# Allegro board C112P01-T2-JDQ-A03.brd
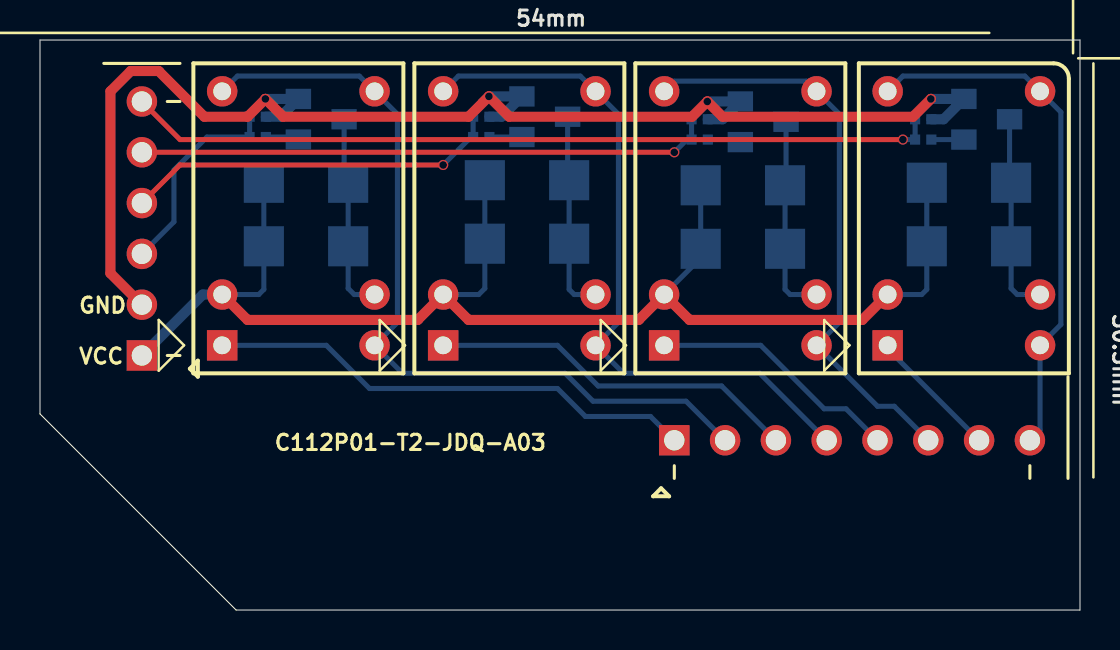
[diagram p0: board, top side]
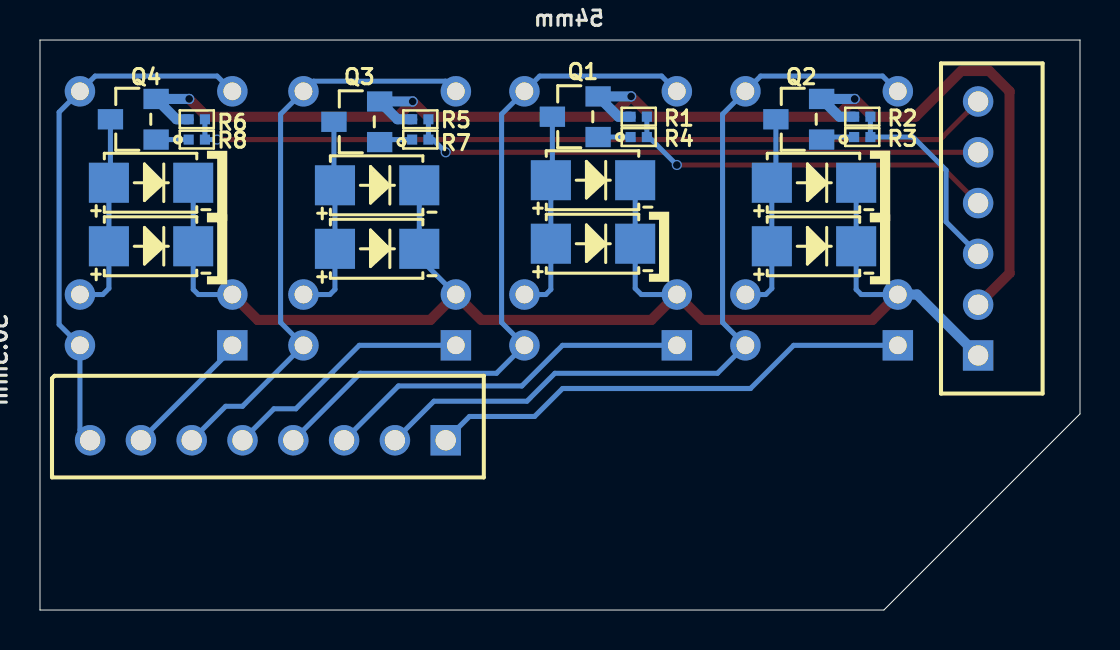
[diagram p1: board, bottom side, seen from below]

Outline 52 x 28.5 mm; copper layers: TOP, BOTTOM. Coordinates in mm from the lower left corner of the outline.
Outline path: 0,28.5 0,9.8 9.81,0 52,0 52,28.5 0,28.5

## Design rules (mm)
constraint set DEFAULT: min track width 0.152
net group GND: nets GND JTAG_TCK/SPI1_SDO JTAG_TDO/SPI1_SDI JTAG_TMS/SPI1_CSN0 JTAG_TRSTN/SPI1_SCLK N17073941 N17073954 N17073967 N17073980

## Placement (name value [footprint] x y rotation side)
D1  S1G  [SMA]  24.35 21.49 180 bottom
D2  S1G  [SMA]  24.35 18.31 180 bottom
D3  S1G  [SMA]  13.3 21.36 180 bottom
D4  S1G  [SMA]  13.3 18.19 180 bottom
D5  S1G  [SMA]  35.14 18.06 180 bottom
D6  S1G  [SMA]  35.14 21.23 180 bottom
D7  S1G  [SMA]  46.45 21.36 180 bottom
D8  S1G  [SMA]  46.45 18.19 180 bottom
J1  CON6  [CON1X6PD254]  5.09 16.54 90 top
J2  CON8  [CON1X8PD254]  35.52 8.49 0 top
K1  HK4100F-DC5V-SHG  [HK4100F-1]  23.97 19.58 90 top
K2  HK4100F-DC5V-SHG  [HK4100F-1]  12.92 19.58 90 top
K3  HK4100F-DC5V-SHG  [HK4100F-1]  35.02 19.58 90 top
K4  HK4100F-DC5V-SHG  [HK4100F-1]  46.19 19.58 90 top
NOREF  -  []  0.47 30.38 0 top
Q1  ss8050  [SOT23-Z]  25.24 24.66 90 bottom
Q2  ss8050  [SOT23-Z]  14.06 24.54 90 bottom
Q3  ss8050  [SOT23-Z]  36.16 24.41 90 bottom
Q4  ss8050  [SOT23-Z]  47.34 24.54 90 bottom
R1  10K  [SR0402]  22.06 24.66 0 bottom
R2  10K  [SR0402]  10.89 24.66 0 bottom
R3  1K  [SR0402]  10.89 23.65 0 bottom
R4  1K  [SR0402]  22.06 23.65 0 bottom
R5  10K  [SR0402]  32.98 24.54 0 bottom
R6  10K  [SR0402]  44.16 24.54 0 bottom
R7  1K  [SR0402]  32.98 23.52 0 bottom
R8  1K  [SR0402]  44.16 23.52 0 bottom

## Library data of the parts
D1 = DIODE_16
D2 = DIODE_14
D3 = DIODE_11
D4 = DIODE_12
D5 = DIODE_15
D6 = DIODE_17
D7 = DIODE_18
D8 = DIODE_19
J1 = CON6: Tolerance: #TOL; User Part Number: HAMP
J2 = CON8: Tolerance: #TOL; User Part Number: HAMP
K1-K4 = HK4100F-DC5V-SHG
Q1-Q4 = PNP BEC
R1-R8 = R: signal model: DEFAULT_RESISTOR_33000OHM_1_2

## Footprints (pads in the part's own frame, mm; a bottom-side part is the same pattern mirrored in y, then rotated)
CON1X6PD254
  rect 1.524x1.524 hole 1.016: 1(-3.81,0)
  round 1.524 hole 1.016: 2(-1.27,0) 3(1.27,0) 4(3.81,0) 5(6.35,0) 6(8.89,0)
CON1X8PD254
  rect 1.524x1.524 hole 1.016: 1(-3.81,0)
  round 1.524 hole 1.016: 2(-1.27,0) 3(1.27,0) 4(3.81,0) 5(6.35,0) 6(8.89,0) 7(11.43,0) 8(13.97,0)
HK4100F-1
  rect 1.524x1.524 hole 0.889: 1(-6.35,3.81)
  round 1.524 hole 0.889: 2(-6.35,-3.81) 3(-3.81,3.81) 4(-3.81,-3.81) 5(6.35,3.81) 6(6.35,-3.81)
SMA
  rect 2.007x2.007 smd: 1(-2.108,0) 2(2.108,0)
SOT23-Z
  rect 1.016x1.27 smd: 1(-1.016,-1.143) 2(1.016,-1.143) 3(0,1.143)
SR0402
  rect 0.508x0.508 smd: 1(-0.406,0) 2(0.406,0)

## Nets
GND: J1.2 Q1.2(E) Q2.2(E) Q3.2(E) Q4.2(E) R1.2(B) R2.2(B) R5.2(B) R6.2(B)
VCC_1: D1.2 D2.2 D3.2 D4.2 D5.2 D6.2 D7.2 D8.2 J1.1 K1.3 K2.3 K3.3 K4.3
JTAG_TCK/SPI1_SDO: J1.4 R1.1(A) R4.1(A)
JTAG_TDO/SPI1_SDI: J1.6 R6.1(A) R8.1(A)
JTAG_TMS/SPI1_CSN0: J1.5 R5.1(A) R7.1(A)
JTAG_TRSTN/SPI1_SCLK: J1.3 R2.1(A) R3.1(A)
RELAY+1: J2.1 K2.1
RELAY+2: J2.3 K1.1
RELAY+3: J2.5 K3.1
RELAY+4: J2.7 K4.1
RELAY-1: J2.2 K2.2 K2.5 K2.6
RELAY-2: J2.4 K1.2 K1.5 K1.6
RELAY-3: J2.6 K3.2 K3.5 K3.6
RELAY-4: J2.8 K4.2 K4.5 K4.6
N17073585: D7.1 D8.1 K4.4 Q4.3(C)
N17073629: D3.1 D4.1 K2.4 Q2.3(C)
N17073691: D1.1 D2.1 K1.4 Q1.3(C)
N17073747: D5.1 D6.1 K3.4 Q3.3(C)
N17073941: Q2.1(B) R3.2(B)
N17073954: Q1.1(B) R4.2(B)
N17073967: Q4.1(B) R8.2(B)
N17073980: Q3.1(B) R7.2(B)

## Via types
v1: diameter 0.508, hole 0.381, TOP to BOTTOM, 7 vias

## Routing (per net, layer and track width the routed paths; a pad name or vN(x,y) marks a point on that pad's centre or on a via; arc(x,y) is an arc through that point)
GND: length 71
  TOP w0.508: J1.2 3.52,16.84 3.52,25.93 4.54,26.95 5.93,26.95 8.22,24.66 10.38,24.66 v1(11.27,25.55) 12.16,24.66 21.43,24.66 v1(22.44,25.68) 23.46,24.66 32.6,24.66 v1(33.37,25.43) 34.13,24.66 43.65,24.66 v1(44.54,25.55)
  BOTTOM w0.508: R5.2 34.13,24.54 Q3.2 v1(33.37,25.43) ; R1.2 23.08,24.66 Q1.2 v1(22.44,25.68) ; R6.2 45.18,24.54 Q4.2 v1(44.54,25.55) ; R2.2 12.03,24.66 Q2.2 v1(11.27,25.55)
VCC_1: length 70.5
  TOP w0.508: K4.3 41.11,14.5 32.48,14.5 K3.3 29.94,14.5 21.43,14.5 20.16,15.77 18.89,14.5 10.38,14.5 K2.3
  BOTTOM w0.254: D7.2 D8.2 44.34,16.03 44.08,15.77 K4.3 ; K3.3 33.04,17.6 D5.2 D6.2 ; D3.2 D4.2 11.19,16.03 10.94,15.77 K2.3 ; 20.16,15.77 21.94,15.77 22.24,16.08 D2.2 D1.2
  BOTTOM w0.508: K2.3 8.14,15.77 J1.1
JTAG_TCK/SPI1_SDO: length 18.9
  TOP w0.254: v1(20.16,22.25) 7,22.25 J1.4
  BOTTOM w0.254: R1.1 R4.1 21.55,23.65 v1(20.16,22.25)
JTAG_TDO/SPI1_SDI: length 40.5
  TOP w0.254: v1(43.14,23.52) 7,23.52 J1.6
  BOTTOM w0.254: R6.1 R8.1 v1(43.14,23.52)
JTAG_TMS/SPI1_CSN0: length 28.8
  TOP w0.254: v1(31.71,22.89) J1.5
  BOTTOM w0.254: R5.1 R7.1 32.35,23.52 v1(31.71,22.89)
JTAG_TRSTN/SPI1_SCLK: length 10.3
  BOTTOM w0.254: R2.1 R3.1 8.35,23.65 6.7,22 6.7,19.41 J1.3
RELAY+1: length 24.6
  BOTTOM w0.254: J2.1 30.52,9.68 27.27,9.68 25.87,11.07 16.47,11.07 14.32,13.23 K2.1
RELAY+2: length 18.6
  BOTTOM w0.254: J2.3 34.08,11.2 27.9,11.2 25.87,13.23 20.16,13.23
RELAY+3: length 12.6
  BOTTOM w0.254: J2.5 40.3,10.06 39.21,10.06 36.03,13.23 K3.1
RELAY+4: length 6.6
  BOTTOM w0.254: K4.1 42.38,13.06 J2.7
RELAY-1: length 41.4
  BOTTOM w0.254: J2.2 32.3,10.44 27.65,10.44 26.25,11.84 18.13,11.84 K2.2 17.87,14.38 17.87,24.79 K2.6 15.97,26.7 9.87,26.7 K2.5
RELAY-2: length 35.4
  BOTTOM w0.254: J2.4 35.98,11.84 29.18,11.84 K1.2 28.92,14.38 28.92,24.79 K1.6 27.02,26.7 20.92,26.7 20.16,25.93
RELAY-3: length 29.2
  BOTTOM w0.254: J2.6 42.72,10.19 41.88,10.19 K3.2 39.97,14.38 39.97,24.79 K3.6 38.32,26.44 31.71,26.44 K3.5
RELAY-4: length 26.8
  BOTTOM w0.254: K4.5 43.14,26.7 49.24,26.7 K4.6 51.04,24.89 51.04,14.28 K4.2 50,8.99 J2.8
N17073585: length 10.1
  BOTTOM w0.254: Q4.3 48.48,21.44 D7.1 D8.1 48.56,16.08 48.86,15.77 K4.4
N17073629: length 10
  BOTTOM w0.254: K2.4 15.71,15.77 15.41,16.08 D4.1 D3.1 15.21,21.57 Q2.3
N17073691: length 10.1
  BOTTOM w0.254: Q1.3 26.38,21.57 D1.1 D2.1 26.46,16.03 26.71,15.77 K1.4
N17073747: length 10.1
  BOTTOM w0.254: K3.4 37.51,15.77 37.25,16.03 D5.1 D6.1 37.3,21.29 Q3.3
N17073941: length 1.7
  BOTTOM w0.254: 12.92,23.52 12.79,23.65 R3.2
N17073954: length 1.6
  BOTTOM w0.254: R4.2 Q1.1
N17073967: length 1.6
  BOTTOM w0.254: R8.2 46.19,23.52
N17073980: length 1.7
  BOTTOM w0.254: Q3.1 34.89,23.52 R7.2

## Text on the board
Board Geometry/Outline: 54mm | 30.5mm
Ref Des/Silkscreen Top: GND | VCC | C112P01-T2-JDQ-A03
User.9: FIGURE | SIZE | 0.381 | 0.889 | 1.016 | DRILL CHART: TOP to BOTTOM | ALL UNITS ARE IN MILLIMETERS | TOLERANCE | +0.0508/-0.0508 | +0.0/-0.0 | PLATED | QTY | 7 | 24 | 14
